# Altium PCB PCB.PcbDoc
Units mil, origin at the board's own origin, x right, y up, seen from the top; angles counter-clockwise.
Board outline 3641.73 x 2854.33 mil, 2 copper layers (Top Layer, Bottom Layer); 65 components, 62 nets, 324 pads, 123 vias.
Unrouted connection lines stored in the file: 2.
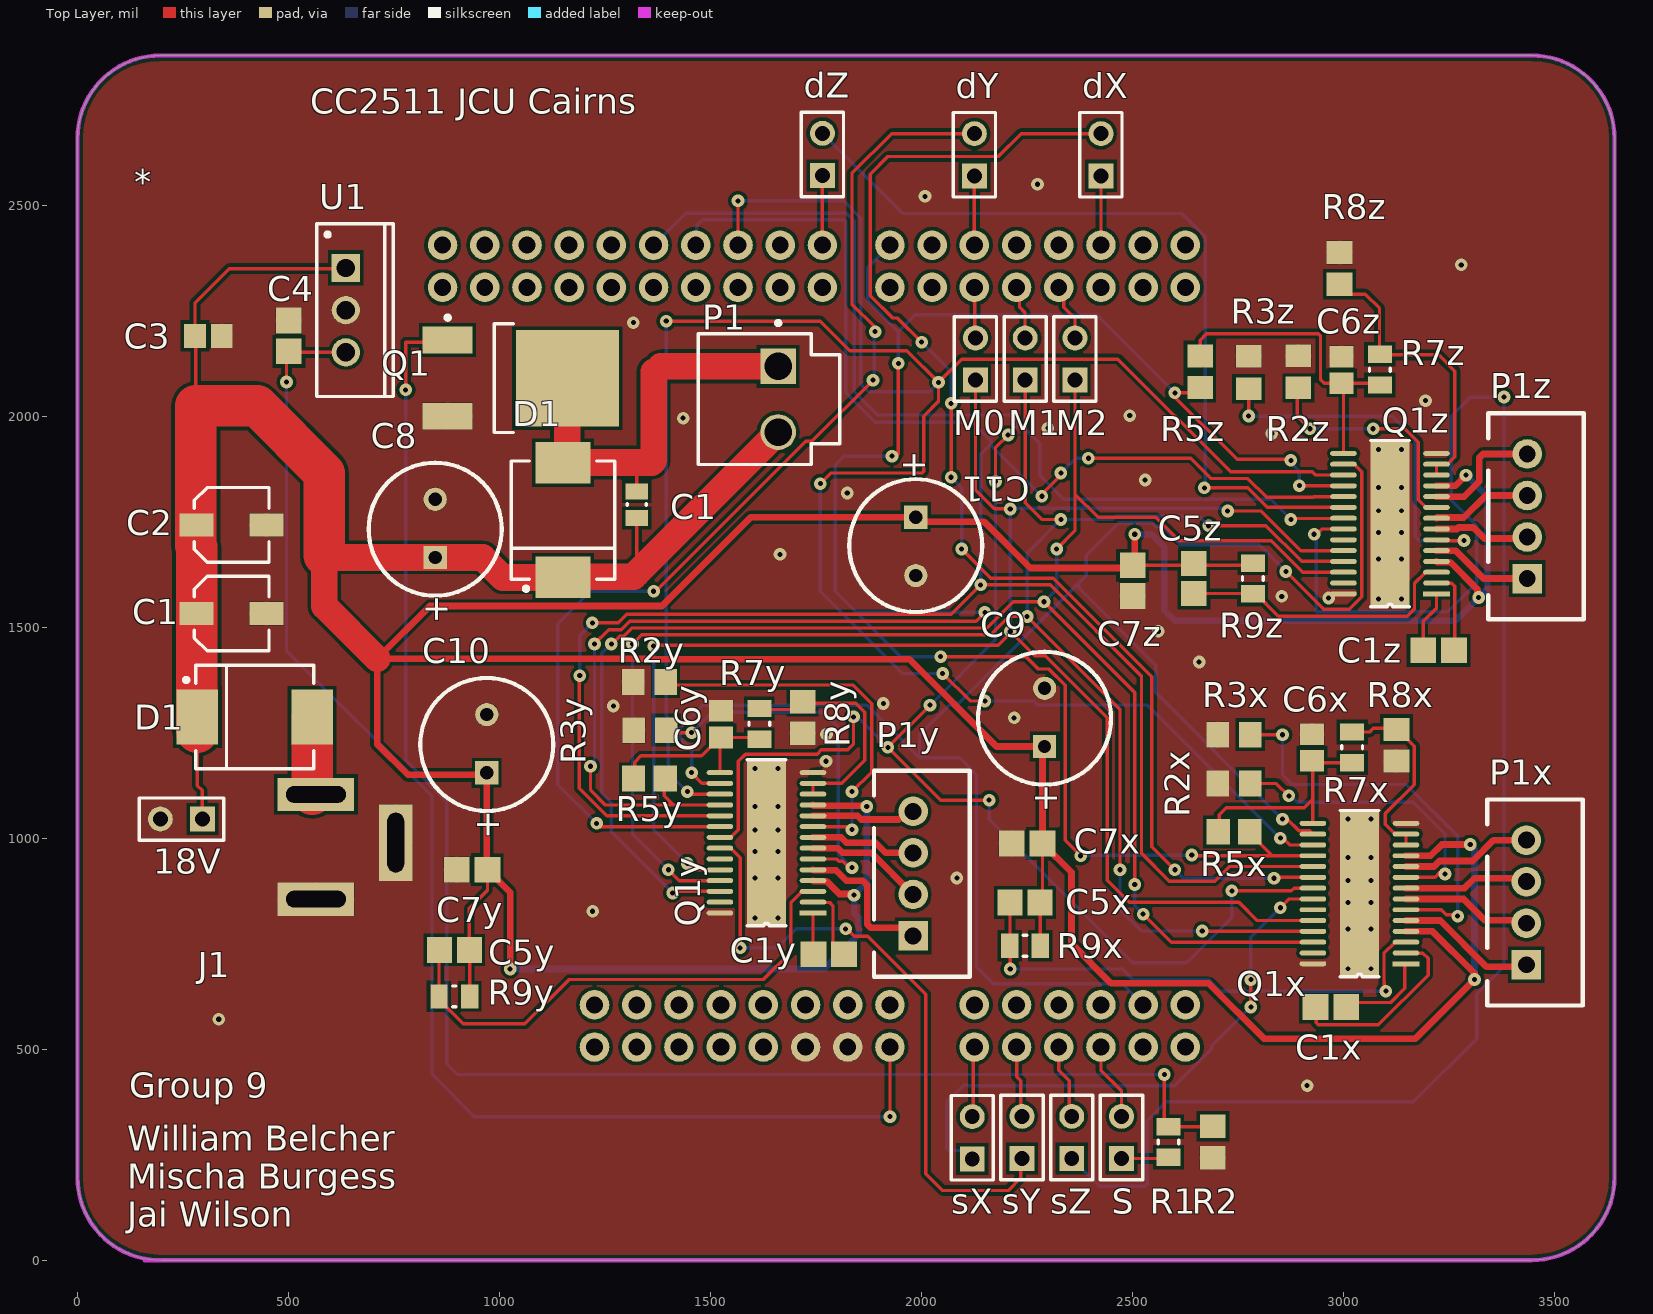
[diagram p0: Top Layer view]
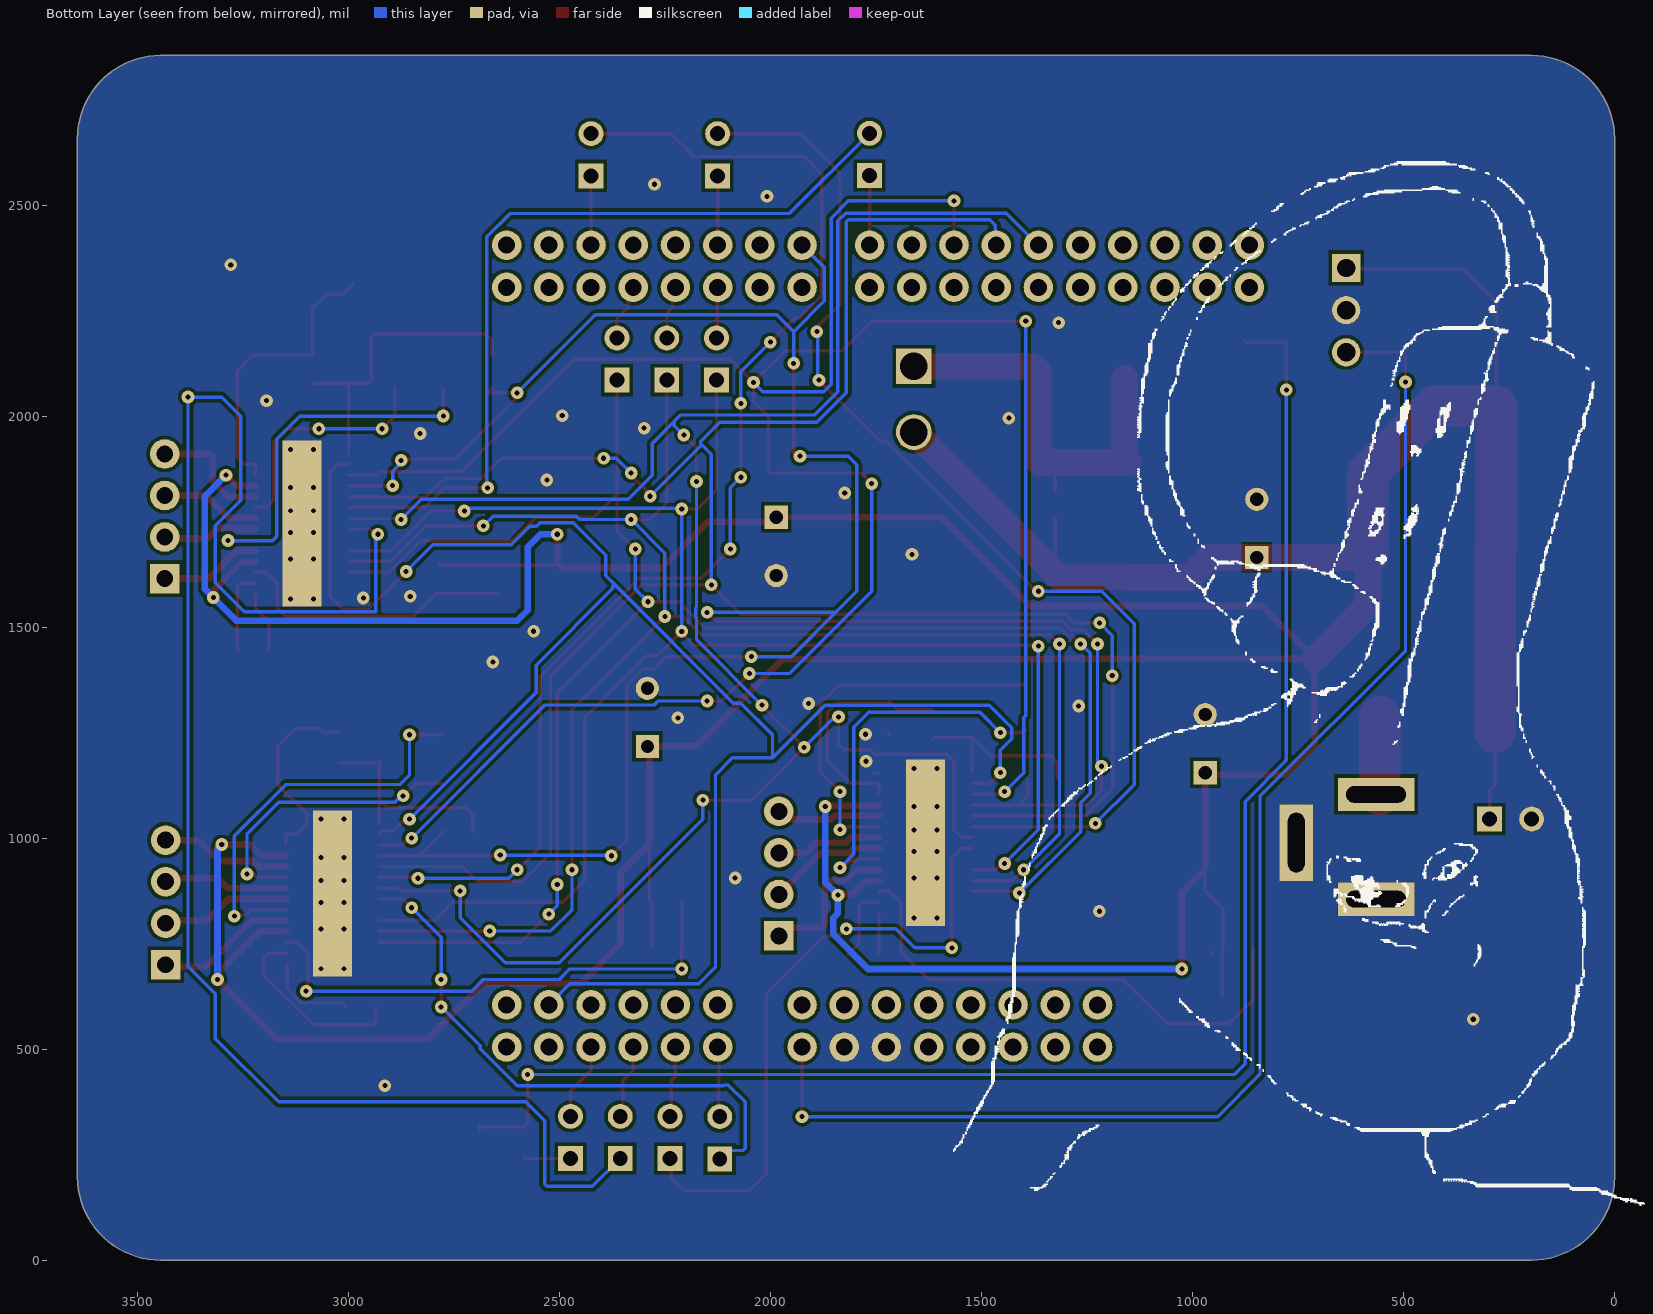
[diagram p1: Bottom Layer view, seen from below]

## Layer stack, top to bottom
Top Solder: solder mask 0.4, Solder Resist, Dk 3.5
Top Layer: signal copper 1.4
Dielectric 1: dielectric 12.6, FR-4, Dk 4.8
Bottom Layer: signal copper 1.4
Bottom Solder: solder mask 0.4, Solder Resist, Dk 3.5

## Board outline
3444.88,0 ccw(c3444.88,196.85) 3641.73,196.85 3641.73,2657.48 ccw(c3444.88,2657.48) 3444.88,2854.33 196.85,2854.33 ccw(c196.85,2657.48) 0,2657.48 0,196.85 ccw(c196.85,196.85) 196.85,0

## Design rules (kind name [scope] priority, off if disabled: settings)
Clearance [All] p1: gap=8 ignorepadtopadclearanceinfootprint=TRUE
HoleSize [All] p1: absolutevalues=TRUE maxlimit=150 minlimit=11 maxpercent=80.000 minpercent=20.000
MinimumSolderMaskSliver [All] p1: minsoldermaskwidth=1.8
PolygonConnect "DRV8825 Heatsinking" [HasFootprint('DRV8825 HTSSOP') vs InNet('GND')] p1: connectstyle=Direct reliefconductorwidth=10 reliefentries=4 polygonreliefangle="90 Angle" airgapwidth=10
RoutingVias [All] p1: holewidth=12 width=30 viastyle="Through Hole" minholewidth=12 minwidth=30 maxholewidth=28 maxwidth=50
SilkToSilkClearance [All] p1 off: silktosilkclearance=0.8
SilkToSolderMaskClearance [IsPad] p1 off: minsilkscreentomaskgap=10 clearancetoexposedcopper=TRUE
SolderMaskExpansion [All] p1: expansion=4
Width [All] p1: maxlimit=236.22 minlimit=8 preferedwidth=8
26 further rules are at their usual default settings.

## Classes and differential pairs
channel class StepperController: SC1 SC2 SC3
component class Schematic: C8 C9 C10 C11 dX dY M0 M1 M2 S sX sY sZ
component class SC3: C1z C5z C6z C7z P1z Q1z R2z R3z R5z R7z R8z R9z
component class SC2: C1y C5y C6y C7y P1y Q1y R2y R3y R5y R7y R8y R9y
component class SC1: C1x C5x C6x C7x P1x Q1x R2x R3x R5x R7x R8x R9x
component class PR: 18V C1 C2 C3 C4 D1 J1 U1
component class MC: 18V C1 D1 P1 Q1 R1 R2
component class H1: *

## Components (designator, comment, footprint, x,y, rotation, side; value= is the part's Value field where it differs from the comment)
18V "Header 2" HDR1X2 296.26,1045.28 r180 top (schematic designator P1)
* "NXP FRDM-K22F" FRDM-K22F 125,405 r0 top locked
C1 "CAP 1uF 25V 0805(2012)" CAPC0805(2012)145_L 1325,1790 r90 top value=1uF
C1 "EEE-1CA100SR" PNSC-EEE1CA100SR_L 365,1532.17 r0 top
C1x "08055C103JAT2A" CAPC2013X94X50ML20T25 2970,600 r180 top (schematic designator C1)
C1y "08055C103JAT2A" CAPC2013X94X50ML20T25 1780,725 r0 top (schematic designator C1)
C1z "08055C103JAT2A" CAPC2013X94X50ML20T25 3225,1445 r0 top (schematic designator C1)
C2 "EEE-1CA100SR" PNSC-EEE1CA100SR_L 365,1742.17 r0 top
C3 "08053C334KAT2A" CAPC2013X140X50NL20T25 310,2190 r0 top
C4 "08055C103JAT2A" CAPC2013X94X50ML20T25 500.82,2189.96 r270 top
C5x "C0805C104K3RAC7800" CAPC2013X145X50ML20T25 2245,847.53 r0 top (schematic designator C5)
C5y "C0805C104K3RAC7800" CAPC2013X145X50ML20T25 892.99,735 r0 top (schematic designator C5)
C5z "C0805C104K3RAC7800" CAPC2013X145X50ML20T25 2645,1615 r90 top (schematic designator C5)
C6x "C0805C474K5RACTU" CAPC2013X110X50NL20T25 2925,1215 r270 top (schematic designator C6)
C6y "C0805C474K5RACTU" CAPC2013X110X50NL20T25 1525,1270 r270 top (schematic designator C6)
C6z "C0805C474K5RACTU" CAPC2013X110X50NL20T25 2995,2109.43 r270 top (schematic designator C6)
C7x "08055C103JAT2A" CAPC2013X94X50ML20T25 2250,987.55 r0 top (schematic designator C7)
C7y "08055C103JAT2A" CAPC2013X94X50ML20T25 935,925.34 r0 top (schematic designator C7)
C7z "08055C103JAT2A" CAPC2013X94X50ML20T25 2500,1610 r90 top (schematic designator C7)
C8 "100uF, 50V" "Capacitor radial 8mm" 847.42,1665 r90 top
C9 "100uF, 50V" "Capacitor radial 8mm" 2291.43,1217.2 r90 top
C10 "100uF, 50V" "Capacitor radial 8mm" 969.91,1155 r90 top
C11 "100uF, 50V" "Capacitor radial 8mm" 1986.23,1760 r270 top
D1 "B540C-13-F" FP-SMC-MFG 1150.31,1753.42 r90 top value=300pF
D1 "B540C-13-F" FP-SMC-MFG 420,1287.17 r0 top value=300pF
dX "Header 2" HDR1X2 2425,2569.2 r90 top (schematic designator P3)
dY "Header 2" HDR1X2 2125,2569.2 r90 top (schematic designator P6)
dZ "Header 2" HDR1X2 1765,2570 r90 top (schematic designator P10)
J1 "Barrel Jack 5.5x2.1mm" "Barrel Jack 2.1x5.5mm THT" 565,564.1 r0 top
M0 "Header 2" HDR1X2 2127.61,2085 r90 top (schematic designator P5)
M1 "Header 2" HDR1X2 2245.49,2085 r90 top (schematic designator P7)
M2 "Header 2" HDR1X2 2363.38,2085 r90 top (schematic designator P8)
P1 "B2P-VH(LF)(SN)" JST-B2P-VH(LF)(SN)_V 1605,2040 r270 top
P1x "B4B-XH-A (LF)(SN)" "B4B-XH-A (LF)(SN)" 3432.78,700 r90 top (schematic designator P1)
P1y "B4B-XH-A (LF)(SN)" "B4B-XH-A (LF)(SN)" 1980,768.15 r90 top (schematic designator P1)
P1z "B4B-XH-A (LF)(SN)" "B4B-XH-A (LF)(SN)" 3435,1615 r90 top (schematic designator P1)
Q1 "NTD6415ANLT4G" ONSC-DPAK-3-369AA-01_V 1050.31,2090 r0 top
Q1x "DRV8825" "DRV8825 HTSSOP" 3147.68,702.32 r180 top (schematic designator Q1)
Q1y "DRV8825" "DRV8825 HTSSOP" 1742.68,822.61 r180 top (schematic designator Q1)
Q1z "DRV8825" "DRV8825 HTSSOP" 3220,1578.82 r180 top (schematic designator Q1)
R1 "RK73H2ATTD1R00F" RESC2013X60X30NL20T20 2585,280 r90 top
R2 "ERA6AEB103V" RESC2013X60X40ML20T25 2690,280 r90 top
R2x "RL1220S-R20-F" RESC2013X50X40ML20T20 2740,1129.34 r0 top (schematic designator R2)
R2y "RL1220S-R20-F" RESC2013X50X40ML20T20 1355,1370 r0 top (schematic designator R2)
R2z "RL1220S-R20-F" RESC2013X50X40ML20T20 2892.47,2105 r270 top (schematic designator R2)
R3x "RL1220S-R20-F" RESC2013X50X40ML20T20 2740,1245 r0 top (schematic designator R3)
R3y "RL1220S-R20-F" RESC2013X50X40ML20T20 1356.61,1255.66 r0 top (schematic designator R3)
R3z "RL1220S-R20-F" RESC2013X50X40ML20T20 2775,2103.39 r270 top (schematic designator R3)
R5x "ERA6AEB103V" RESC2013X60X40ML20T25 2740,1015 r0 top (schematic designator R5)
R5y "ERA6AEB103V" RESC2013X60X40ML20T25 1355,1141.32 r0 top (schematic designator R5)
R5z "ERA6AEB103V" RESC2013X60X40ML20T25 2660,2105 r270 top (schematic designator R5)
R7x "CRCW08051K60FKEA" RESC2013X50X30NL20T20 3020,1215 r270 top (schematic designator R7)
R7y "CRCW08051K60FKEA" RESC2013X50X30NL20T20 1615.72,1270.67 r270 top (schematic designator R7)
R7z "CRCW08051K60FKEA" RESC2013X50X30NL20T20 3085.72,2110 r270 top (schematic designator R7)
R8x "ERA6AEB103V" RESC2013X60X40ML20T25 3125,1220 r90 top (schematic designator R8)
R8y "ERA6AEB103V" RESC2013X60X40ML20T25 1718.25,1285.94 r90 top (schematic designator R8)
R8z "ERA6AEB103V" RESC2013X60X40ML20T25 2990,2350 r270 top (schematic designator R8)
R9x "RK73B2ATTD105J" RESC2013X60X30NL20T20 2245,745 r180 top (schematic designator R9)
R9y "RK73B2ATTD105J" RESC2013X60X30NL20T20 892.99,625 r180 top (schematic designator R9)
R9z "RK73B2ATTD105J" RESC2013X60X30NL20T20 2785,1615 r270 top (schematic designator R9)
S "Header 2" HDR1X2 2473.65,240.8 r90 top (schematic designator P10)
sX "Header 2" HDR1X2 2120,240 r90 top (schematic designator P2)
sY "Header 2" HDR1X2 2237.88,240.8 r90 top (schematic designator P4)
sZ "Header 2" HDR1X2 2355.77,240.8 r90 top (schematic designator P9)
U1 "L7805CV" TO220 635.83,2250.98 r270 top

## Footprints (in the part's own frame and the unit in brackets; to place one, negate y for a bottom-side part, rotate by r counter-clockwise, add the part's x,y. Pads: shape width x height; smd on the part's side, far side on the other; paste and mask are expansions set on the pad)
"B4B-XH-A (LF)(SN)" [mil] "B4B-XH-A (LF)(SN) Wire-To-Board Connector, Vertical, 2.5 mm, 4 Contacts"
  rect 70x70 hole 40: 1(0,0)
  round 70 hole 40: 2(98.43,0) 3(196.85,0) 4(295.28,0)
  silkscreen extent -96,-134 392,93, body extent -97,-134 391,92, height 276
"Barrel Jack 2.1x5.5mm THT" [mm] "GCT DCJ200-10-A-K1-K"
  rect 4.6x2 hole 1 slot 3.6 at 0 deg: 1(0,13.7) 2(0,7.4)
  rect 2x4.6 hole 1 slot 3.6 at 90 deg: 2(4.8,10.8)
  body extent -4.47,0 5.07,14.3, height 11
"Capacitor radial 8mm" [mm] "Radial electrolytic cap, 8mm body, 3.5mm pin separation"
  rect 1.4x1.4 hole 0.8: 1(0,0)
  round 1.4 hole 0.8: 2(3.5,0)
  silkscreen extent -2.3,-4 5.7,4, body extent -2.2,-4 5.8,4, height 11.5
CAPC0805(2012)145_L [mm] "Chip Capacitor, Body 2.0x1.2mm, Height 1.45mm, IPC High Density"
  rect 0.95x1.35 smd: 1(-0.8,0) 2(0.8,0)
  silkscreen extent -0.05,-0.58 0.05,0.58, body extent -1.1,-0.72 1.1,0.72, height 1.45
CAPC2013X94X50ML20T25 [mm] "Chip Capacitor, 2-Leads, Body 2.01x1.25mm, IPC Low Density"
  rect 1.55x1.55 smd: 1(-0.925,0) 2(0.925,0)
  body extent -1.1,-0.72 1.11,0.72, height 0.94
CAPC2013X110X50NL20T25 [mm] "Chip Capacitor, 2-Leads, Body 2.00x1.25mm, IPC Medium Density"
  rect 1.3x1.45 smd: 1(-0.8,0) 2(0.8,0)
  body extent -1.1,-0.72 1.1,0.72, height 1.1
CAPC2013X140X50NL20T25 [mm] "Chip Capacitor, 2-Leads, Body 2.00x1.25mm, IPC Medium Density"
  rect 1.3x1.45 smd: 1(-0.8,0) 2(0.8,0)
  body extent -1.1,-0.72 1.1,0.72, height 1.4
CAPC2013X145X50ML20T25 [mm] "Chip Capacitor, 2-Leads, Body 2.00x1.25mm, IPC Low Density"
  rect 1.5x1.55 smd: 1(-0.9,0) 2(0.9,0)
  body extent -1.1,-0.72 1.1,0.72, height 1.45
"DRV8825 HTSSOP" [mm]
  rect 1.6x0.3 smd paste+0 mask+0.07: 1(0,0)
  oval 1.6x0.3 smd paste+0 mask+0.07: 2(0,-0.65) 3(0,-1.3) 4(0,-1.95) 5(0,-2.6) 6(0,-3.25) 7(0,-3.9) 8(0,-4.55) 9(0,-5.2) 10(0,-5.85) 11(0,-6.5) 12(0,-7.15) 13(0,-7.8) 14(0,-8.45) 15(5.6,-8.45) 16(5.6,-7.8) 17(5.6,-7.15) 18(5.6,-6.5) 19(5.6,-5.85) 20(5.6,-5.2) 21(5.6,-4.55) 22(5.6,-3.9) 23(5.6,-3.25) 24(5.6,-2.6) 25(5.6,-1.95) 26(5.6,-1.3) 27(5.6,-0.65) 28(5.6,0)
  round 0.6 hole 0.3: PPAD(2.1,0.3) PPAD(2.1,-3.7) PPAD(2.1,-2.1) PPAD(2.1,-6.4) PPAD(2.1,-5) PPAD(2.1,-8.7) PPAD(3.5,-2.1) PPAD(3.5,0.3) PPAD(3.5,-8.7) PPAD(3.5,-6.4) PPAD(3.5,-5) PPAD(3.5,-3.7)
  rect 2.34x5.18 smd paste+0: PPAD(2.8,-4.225)
  rect 2.34x10 smd paste-100 mask-100: PPAD(2.8,-4.225)
  rect 2.34x10 smd far side paste-100 mask-100: PPAD(2.8,-4.225)
  Top Layer region: 1.1,0.9
  silkscreen extent 1.63,-9.23 3.98,0.77, body extent -0.65,-9.34 6.25,0.87, height 1.11
FP-SMC-MFG [mm]
  rect 2.5x3.3 smd paste+0 mask+0: 1(-3.45,0) 2(3.45,0)
  silkscreen extent -4.25,-3.11 3.55,3.11, body extent -4.8,-3.21 4.8,3.21, height 0.25
FRDM-K22F [mil] "NXP FRDM-K22F development board"
  round 70 hole 40: J1_1(2500,1900) J1_2(2500,2000) J1_3(2400,1900) J1_4(2400,2000) J1_5(2300,1900) J1_6(2300,2000) J1_7(2200,1900) J1_8(2200,2000) J1_9(2100,1900) J1_10(2100,2000) J1_11(2000,1900) J1_12(2000,2000) J1_13(1900,1900) J1_14(1900,2000) J1_15(1800,1900) J1_16(1800,2000) J2_1(1640,1900) J2_2(1640,2000) J2_3(1540,1900) J2_4(1540,2000) J2_5(1440,1900) J2_6(1440,2000) J2_7(1340,1900) J2_8(1340,2000) J2_9(1240,1900) J2_10(1240,2000) J2_11(1140,1900) J2_12(1140,2000) J2_13(1040,1900) J2_14(1040,2000) J2_15(940,1900) J2_16(940,2000) J2_17(840,1900) J2_18(840,2000) J2_19(740,1900) J2_20(740,2000) J24_1(2000,200) J24_2(2000,100) J24_3(2100,200) J24_4(2100,100) J24_5(2200,200) J24_6(2200,100) J24_7(2300,200) J24_8(2300,100) J24_9(2400,200) J24_10(2400,100) J24_11(2500,200) J24_12(2500,100) J25_1(1100,200) J25_2(1100,100) J25_3(1200,200) J25_4(1200,100) J25_5(1300,200) J25_6(1300,100) J25_7(1400,200) J25_8(1400,100) J25_9(1500,200) J25_10(1500,100) J25_11(1600,200) J25_12(1600,100) J25_13(1700,200) J25_14(1700,100) J25_15(1800,200) J25_16(1800,100)
  body extent 690,50 2550,2050, height 335
HDR1X2 [mm] "Connector; Header; 2 Position"
  rect 1.5x1.5 hole 0.9: 1(0,0)
  round 1.5 hole 0.9: 2(2.54,0)
  silkscreen extent -1.27,-1.27 3.81,1.27
JST-B2P-VH(LF)(SN)_V [mm] "THD, 2-Leads, Body 8.5x7.86mm, Pitch 3.96mm"
  rect 2.15x2.15 hole 1.65: 1(-1.98,1.4)
  round 2.15 hole 1.65: 2(1.98,1.4)
  silkscreen extent -4.7,-3.4 3.93,5.1, body extent -3.93,-3.2 3.93,5.3, height 10.9
ONSC-DPAK-3-369AA-01_V [mm] "DPAK, 3-Leads, Body 6.54x6.095mm, Pitch 2.29mm"
  rect 3x1.6 smd: 1(-4.4,2.29) 3(-4.4,-2.29)
  rect 6.2x5.8 smd: 4(2.8,0)
  silkscreen extent -4.52,-3.27 -0.45,3.76, body extent -1.6,-3.27 4.49,3.27, height 2.47
PNSC-EEE1CA100SR_L [mm] "Aluminum Electrolytic Capacitor, 2-Leads, Body 4.5x4.5mm, IPC High Density"
  rect 2.05x1.4 smd: 1(-2.1,0) 2(2.1,0)
  silkscreen extent -2.25,-2.25 2.25,2.25, body extent -2.75,-2.25 2.75,2.25, height 5.5
RESC2013X50X30NL20T20 [mm] "Chip Resistor, 2-Leads, Body 2.00x1.25mm, IPC Medium Density"
  rect 1.05x1.45 smd: 1(-0.925,0) 2(0.925,0)
  silkscreen extent -0.1,-0.63 0.1,0.63, body extent -1.1,-0.72 1.1,0.72, height 0.5
RESC2013X50X40ML20T20 [mm] "Chip Resistor, 2-Leads, Body 2.00x1.25mm, IPC Low Density"
  rect 1.35x1.55 smd: 1(-0.975,0) 2(0.975,0)
  body extent -1.1,-0.72 1.1,0.72, height 0.5
RESC2013X60X30NL20T20 [mm] "Chip Resistor, 2-Leads, Body 2.00x1.25mm, IPC Medium Density"
  rect 1.05x1.45 smd: 1(-0.925,0) 2(0.925,0)
  silkscreen extent -0.1,-0.63 0.1,0.63, body extent -1.1,-0.72 1.1,0.72, height 0.6
RESC2013X60X40ML20T25 [mm] "Chip Resistor, 2-Leads, Body 2.00x1.25mm, IPC Low Density"
  rect 1.4x1.55 smd: 1(-0.95,0) 2(0.95,0)
  body extent -1.1,-0.72 1.1,0.72, height 0.6
TO220 [mm] "TO, Thru-Hole, Vertical, Heatsink Mounted; 3 In-Line Leads; Pitch 2.54 mm"
  rect 1.7x1.7 hole 1.1: 1(-2.54,0)
  round 1.7 hole 1.1: 2(0,0) 3(2.54,0)
  silkscreen extent -5.2,-1.75 5.2,2.85, body extent -5.25,-1.8 5.25,2.9, height 19.7

## Part data
18V dX dY dZ M0 M1 M2 S sX sY sZ: "Header, 2-Pin", LatestRevisionDate=17-Jul-2002, LatestRevisionNote="Re-released for DXP Platform.", Publisher="Altium Limited"
C1: library part CMP-1036-04757-1, "CAP 1uF 25V -20% to +80% 0805 (2012 Metric) Thickness 1.45mm SMD", Case-EIA=0805, Case-Metric=2012, Rated Voltage="25 V", Tolerance="-20% to +80%", Max Thickness="1.45 mm", Technology=SMT
C1 C2: library part CMP-2000-06199-1, "Aluminum Electrolytic Capacitor, 10 uF, +/- 20%, -40 to 85 degC, 2-Pin SMD, RoHS, Tape and Reel", AC Ripple Current=28mA, AE Capacitor Case=RadialCan-SMD, Capacitance=10µF, Capacitance Tolerance=±20%, Capacitor Mounting=SMD, Leakage Current=3µA, Life Time @ Temperature=2000hours@85°C, Manufacturer=Panasonic, Operating Life Temperature=85°C, Operating life Time=2000h, Operating Temperature Min=-40°C, Operating Temperature Range=-40°Cto+85°C, Package / Case=B, Package Description="2-Pin Surface Mount Device, Body 4.5 x 4.5 mm", Package Reference=EEE1CA100SR, Power Factor=0.16, Power Factor Frequency=120Hz, Tolerance +=20%, Voltage Rating=16V, Capacitance Tolerance ±=±20%, Capacitor Case Style=RadialCan-SMD, Capacitor Terminals=SMD, Datasheet URL=https://datasheet.ciiva.com/19458/1355487-19458346.pdf, Datasheet Version=04/2005, Diameter=4mm, External Depth=4.3mm, External Length / Height=5.4mm, External Width=4.3mm, Height=5.4mm, Lead Cross-section Width=0.65mm, Lead Length=1.8mm, Lead Spacing=1mm, Lifetime @ Temperature=2000hours@85°C, Manufacturer URL=http://www.panasonic.com/, Mounting Technology=SurfaceMount, No. of Pins=2, Operating Lifetime=2000h, Operating Temperature Max=85°C, Packaging=CutTape, Product Range=PANASONIC-SSeries, Ripple Current AC=28mA, Ripple Current Frequency=120Hz, Ripple Current Temperature=85°C, Series=VS, SVHC=NoSVHC(16-Dec-2013), Tape Width=12mm, Tolerance -=20%, Voltage Rating V DC=16V
C1x C1y C1z C4 C7x C7y C7z: library part CMP-2007-04361-1, Manufacturer="AVX Interconnect / Elco", Part Number=08055C103JAT2A
C3: library part CMP-2007-04608-1, Manufacturer="AVX Interconnect / Elco", Part Number=08053C334KAT2A
C5x C5y C5z: library part CMP-2007-01100-1, Manufacturer=Kemet, Part Number=C0805C104K3RAC7800
C6x C6y C6z: library part CMP-2007-03659-1, Manufacturer=Kemet, Part Number=C0805C474K5RACTU
C8 C9 C10 C11: library part "Cap 100uF, 50V, THT radial", "Electrolytic Capacitor, 100 µF, 50 V, ± 20%, Radial Leaded, 8 mm"
D1 D1: library part CMP-12790-000056-1, "DIODE SCHOTTKY 40V 5A SMC", Capacitance=300pF, Forward Current=5A, Manufacturer="Diodes Inc.", Max Junction Temp=+150°C, Max Repetitive Reverse Voltage=40V, Max Surge Forward Current=100A, Package=SMC, Peak Reverse Current=0.5mA, Temperature="-55°C to +150°C", Temperature Range Low=-55°C, Automotive=No, Automotive Grade=NA, Category=Diode, ComponentLink2Description=Datasheet, ComponentLink2URL=https://www.diodes.com/assets/Datasheets/ds13012.pdf, Device Class L1="Discrete Semiconductors", Device Class L2=Diodes, Device Class L3="Schottky Diodes", Digikey Description="DIODE SCHOTTKY 40V 5A SMC", Footprint Url=https://www.diodes.com/assets/Package-Files/SMC.pdf, Height=2.5mm, Lead Free=Yes, Manufacturer Part Number=B540C-13-F, Mouser Description="Diode: Schottky rectifying; SMD; 40V; 5A; SMC; Package: reel, tape", Octopart=https://octopart.com/b540c-13-f-diodes+inc.-325873, Reverse Voltage=40V, RoHS=TRUE, Standoff Height=0.1mm, Temperature Range High=+150°C
J1: "GCT DCJ200-10-A-K1-K"
P1: library part CMP-1755-00002-1, "Male Header, Pitch 3.96 mm, 1 x 2 Position, Height 10.9 mm, Tail Length 3.7 mm, -25 to 85 degC, RoHS, Bulk", Capacitance="27 pF", Case/Package=0603, Case Code (Metric)=1608, Max Operating Temperature=125degC, Min Operating Temperature=-55degC, Package Quantity=4000, Resistance="100000000000 Ohm", Tolerance=5%, Type (Capacitors)=C0G, Voltage Rating="50 V", Case Code (Imperial)=0603, ComponentLink1Description="Manufacturer URL", ComponentLink1URL=http://www.jst.com/home2.html, ComponentLink2Description=Datasheet, ComponentLink2URL=http://www.jst-mfg.com/product/pdf/eng/eVH.pdf, DatasheetVersion=May-16, Height="0.8 mm", Length="1.6 mm", Mount="Surface Mount", PackageDescription="Male Header, Pitch 3.96 mm, 1 x 2 Position, Height 10.9 mm, Tail Length 3.7 mm", PackageReference=B2P-VH(LF)(SN), Packaging="Tape and Reel", Pins=2, Radiation Hardening=No, REACH SVHC="No SVHC", RoHSCompliant=True, Voltage Rating (DC)="50 V", Width="0.8 mm"
P1x P1y P1z: library part "B4B-XH-A (LF)(SN) Wire-to-board connector", "Wire-to-board connector, vertical, 2.5mm, 4 contacts"
Q1: library part CMP-1058-00352-1, "N-Channel Power MOSFET, 100 V, 23 A, 56 mOhm, 3-Pin DPAK, Pb-Free, Tape and Reel", Manufacturer="On Semiconductor", Package Type=DPAK-3, Channel Polarity="N Channel", Ciss Typ (pF)=1024, ComponentLink1Description="Manufacturer URL", ComponentLink1URL=http://www.onsemi.com/, ComponentLink2Description=Datasheet, ComponentLink2URL=http://www.onsemi.cn/pub_link/Collateral/NTD6415ANL-D.PDF, ComponentLink3Description="Package Specification", ComponentLink3URL=http://www.onsemi.cn/pub_link/Collateral/369AA.PDF, Configuration=Single, Coss Typ (pF)=156, Crss Typ (pF)=70, DatasheetVersion="Rev. 1", ID Max (A)=23, Mounting Technology="Surface Mount", PackageDescription="3-Pin Flange Mount, Body 6.54 x 6.095 mm, Pitch 2.29 mm", PackageReference=DPAK-3-369AA-01, PackageVersion="Rev. B, 06/2010", Packing="Tape and Reel", PartNumber=NTD6415ANLT4G, PD Max (W)=83, Qrr Typ (nC)=152, RoHS=Pb-Free, VGS(th) Max (V)=2, VGS Max (V)=20
Q1x Q1y Q1z: library part "Stepper motor driver DRV8825", "TI DRV8825 Stepper Motor Controller IC"
R1: library part CMP-2001-02169-1, Manufacturer="KOA Speer", Part Number=RK73H2ATTD1R00F
R2 R5x R5y R5z R8x R8y R8z: library part CMP-2001-00582-1, Manufacturer=Panasonic, Part Number=ERA6AEB103V
R2x R2y R2z R3x R3y R3z: library part CMP-2001-03157-1, Manufacturer=Susumu, Part Number=RL1220S-R20-F
R7x R7y R7z: library part CMP-2001-03618-1, Manufacturer="Vishay Dale", Part Number=CRCW08051K60FKEA
R9x R9y R9z: library part CMP-2001-04658-1, Manufacturer="KOA Speer", Part Number=RK73B2ATTD105J
U1: library part CMP-0244-00483-1, "Positive Voltage Regulator, 5V, 3-Pin TO-220", ComponentLink1Description="Manufacturer URL", ComponentLink1URL=http://www.st.com, ComponentLink2Description=Datasheet, ComponentLink2URL=http://www.st.com/internet/com/TECHNICAL_RESOURCES/TECHNICAL_LITERATURE/DATASHEET/CD00000444.pdf, ComponentLink3Description="Package Specification", ComponentLink3URL=http://www.st.com/internet/com/TECHNICAL_RESOURCES/TECHNICAL_LITERATURE/PACKAGE_INFORMATION/CD00004649.pdf, DatasheetVersion=16/11/2011, PackageDescription="TO, Thru-Hole, Vertical, Heatsink Mounted; 3 In-Line Leads; Pitch 2.54 mm", PackageReference=TO220, PackageVersion=ver3.0

## Via types
v1: diameter 30, hole 12, Top Layer to Bottom Layer, 123 vias

## Nets (pads, with @x,y where several pads share a name; then routed paths per layer and width w, separated by ;. In a path a pad name is that pad's centre, name@x,y a point inside that pad or via, vN(x,y) a via of type N, cw(c..) or ccw(c..) an arc to the next point about the centre after c; other vN are vias at no path point)
3V3: C6x.2 C6y.2 C6z.2 Q1x.15 Q1y.15 Q1z.15 R5x.1 R5y.1 R5z.1 R7x.2 R7y.2 R7z.2 | length 1717.2
  Top Layer w8: R5y.1 1320,1143.72 1320,1180 1335,1195 1478.54,1195 1522.05,1238.5 C6y.2 ; Q1y.15 1522.2,1235.71 C6y.2 ; R7y.2@1615.72,1231.81 1609.02,1238.5 C6y.2 ; R5z.1 2660,2180 2675,2195 2940.31,2195 2945,2190.31 2945,2087.39 2954.46,2077.94 C6z.2 ; R5x.1 2705,1017.4 2705,1055 2722,1072 2907,1072 2927.2,1092.2 ; C6x.2 C6x.2@2927.2,1181.3 ; Q1x.15 2927.2,1092.2 ; Q1z.15 2999.53,2073.41 C6z.2 ; R7x.2 2929.92,1178.58 C6x.2@2927.2,1181.3 ; R7z.2 3081.36,2077.94 C6z.2 ; 2927.2,1092.2 C6x.2@2927.2,1181.3
5V: *.J25_16 C4.2 U1.3 | length 3286.3
  Top Layer w8: v1(495.08,2080.71) 495.08,2147.81 C4.2 503.38,2150.98 U1.3 ; v1(1925,340) *.J25_16
  Bottom Layer w8: v1(495.08,2080.71) 495.08,1443.91 840,1098.99 840,440 940,340 v1(1925,340)
18V: 18V.1 C1.1 C2.1 C3.1 C5x.2 C5y.2 C5z.2 C7x.2 C7y.2 C7z.2 C8.1 C9.1 C10.1 C11.1 D1.1 P1.2 Q1x.4 Q1x.11 Q1y.4 Q1y.11 Q1z.4 Q1z.11 R9x.1 R9y.1 R9z.1 U1.1 | length 14727.9
  Top Layer w8: 280,1692.32 282.32,1690 ; 280,2024.25 280,2188.5 C3.1 278.5,2268.5 359.41,2349.41 634.25,2349.41 U1.1 ; D1.1@284.17,1250.75 284.17,1124.29 295.28,1113.19 295.28,1046.26 18V.1 ; R9y.1 929.4,734.02 C5y.2 928.42,833.42 971.42,876.42 C7y.2 ; C5y.2@950,730 C5y.2@952.83,727.17 ; 1317.82,1619.75 1325,1626.93 C1.1@1325,1758.5 ; R9x.1 2281.42,846.55 C5x.2 2286.42,853.51 C7x.2 ; C7z.2@2505,1651.42 C7z.2 2780,1646.42 R9z.1 ; Q1z.4 Q1z.4 Q1z.4@3245.59,1655.59
  Top Layer w15.75: v1(1025,690) 1025,871.76 C7y.2 969.91,926.85 C10.1 964.91,1150 782.8,1150 710,1222.8 710,1425 ; Q1y.4 1744.65,897.41 1775.45,897.41 1805.13,867.73 1837.27,867.73 v1(1840,865) ; Q1y.11 1744.43,1076.76 1868.24,1076.76 v1(1870,1075) ; C7z.2 2493.58,1640 2257.5,1640 2147.5,1750 1996.23,1750 C11.1 1595,1760 1384.87,1549.87 834.87,1549.87 710,1425 ; C7z.2@2505,1651.42 v1(2505,1720) ; Q1x.4 3210.91,779.09 3310,680 v1(3310,665) 3170,525 2811.34,525 2680.46,655.87 2449.13,655.87 2355,750 2355,918.97 C7x.2 2286.42,1212.2 C9.1 2177.8,1217.2 1970.87,1424.13 1352.21,1424.13 1351.34,1425 710,1425 ; Q1x.11 3205.98,958.23 3232.75,985 v1(3300,985) ; Q1z.11 3264.72,1834.72 v1(3290,1860) ; Q1z.4 3221.97,1653.62 3252.77,1653.62 3317.27,1589.12 3317.27,1572.73 v1(3320,1570)
  Top Layer w62.99: 710,1425 585,1550 585,1670 590,1665 C8.1 960,1665 1007.41,1617.59 1150.31,1617.59 1152.47,1619.75 1317.82,1619.75 ; 1325,1626.93 P1.2
  Top Layer w98.43: 280,1692.32 280,2024.25 425.75,2024.25 585,1865 585,1670 ; 282.32,1690 282.32,1532.17 282.32,1252.6 D1.1@284.17,1250.75
  Bottom Layer w15.75: v1(1025,690) 1768.66,690 1850.87,772.21 1850.87,811.24 1840,822.11 v1(1840,865) 1870,895 v1(1870,1075) ; v1(2505,1720) 2545,1720 2575,1690 2575,1540 2600,1515 3265,1515 v1(3320,1570) 3340,1590 3340,1810 v1(3290,1860) ; v1(3300,985) 3310,975 v1(3310,665)
DECAY: *.J2_8 Q1x.19 Q1y.19 Q1z.19 | length 5588.3
  Top Layer w8: v1(1190,1385) 1188.55,1383.55 1188.55,1118.27 1253.89,1052.92 Q1y.19 ; v1(1220,1510) 1281.56,1510 1301.56,1530 2070,1530 v1(2140,1600) 2305,1600 2521,1384 2521,964 2587,898 2694.47,898 2729.11,932.64 Q1x.19 ; v1(2285,1810) 2285,1815 2330,1860 v1(2330,1865) ; v1(2395,1900) 2638.18,1900 2686.18,1852 2773.27,1852 2817.27,1808 2927.79,1808 2928.93,1809.13 Q1z.19
  Bottom Layer w8: v1(1190,1385) 1190,1480 v1(1220,1510) ; *.J2_8 1467,2407 1467,2452 1480,2465 1815,2465 1820,2460 1820,2055 1890,1985 2120,1985 2165,1940 2165,1935 ; v1(2140,1600) 2140,1910 2162.5,1932.5 2165,1935 ; v1(2285,1810) 2165,1930 2165,1935 ; v1(2330,1865) 2365,1900 v1(2395,1900)
DIRx: *.J1_6 dX.1 | length 164.2
  Top Layer w8: *.J1_6 dX.1
DIRy: *.J1_12 dY.1 | length 164.2
  Top Layer w8: *.J1_12 dY.1
DIRz: *.J2_2 dZ.1 | length 165
  Top Layer w8: *.J2_2 dZ.1
FAULT: *.J1_16 Q1x.18 Q1y.18 Q1z.18 R5x.2 R5y.2 R5z.2 | length 6041.8
  Top Layer w8: v1(1215.55,1170.28) 1215.55,1113.89 1250.93,1078.51 1411.49,1078.51 ; v1(1225,1460) 1259,1494 1288.19,1494 1308.19,1514 2129,1514 v1(2150,1535) ; R5y.2 1390,1138.92 1390,1100 1411.49,1078.51 ; Q1y.18 1411.49,1078.51 ; 1945,1910 v1(1945,2125) ; v1(2045,1430) 2247.37,1430 2276.68,1400.69 2301.68,1400.69 2340,1362.37 2340,995 v1(2376.77,958.23) ; v1(2640,960) 2641.77,958.23 2831.22,958.23 ; R5z.2 2672.6,2055 v1(2600,2055) 2600,2045 2747.5,1897.5 2872.5,1897.5 v1(2875,1895) ; R5x.2 2777.4,1012.05 2831.22,958.23 ; v1(2895,1835) 2895.14,1834.86 2999.39,1834.86 Q1z.18 ; Q1x.18 2881.77,958.23 2831.22,958.23
  Bottom Layer w8: v1(1215.55,1170.28) 1225,1179.72 v1(1225,1460) ; *.J1_16 1872,2352 1872,2273 1945,2200 ; v1(1930,1905) 1815,1905 1795,1885 1795,1585 1845,1535 ; v1(1945,2125) 1945,2200 ; v1(2045,1430) 1950,1430 1845,1535 ; v1(2150,1535) 1845,1535 ; v1(2376.77,958.23) 2377.66,959.11 2639.11,959.11 v1(2640,960) ; v1(2600,2055) 2415,2240 1985,2240 1945,2200 ; v1(2875,1895) 2875,1889.05 2895,1869.05 v1(2895,1835)
GND: 18V.2 *.J25_12 *.J25_14 C1.2@447.68,1532.17 C2.2 C3.2 C4.1 C6x.1 C6y.1 C6z.1 C7x.1 C7y.1 C7z.1 C8.2 C9.2 C10.2 C11.2 J1.2 Q1.3 Q1x.14 Q1x.28 Q1x.PPAD Q1y.14 Q1y.28 Q1y.PPAD Q1z.14 Q1z.28 Q1z.PPAD R2.1 R2x.1 R2y.1 R2z.1 R3x.1 R3y.1 R3z.1 R8x.1 R8y.1 R8z.1 U1.2 | length 17.5
  Top Layer w8: R8y.1 R8y.1@1720.72,1246.06 ; Q1y.14 1752.77,1155.29 Q1y.14@1754.53,1157.05
  Bottom Layer w8: v1(1773.62,1182.09) v1@1774.11,1182.58 ; v1@1774.11,1245.57 v1(1774.61,1246.06)
  other v1: 2913.39,413.39 334.65,570.87 1220.47,826.77 2083.66,905.51 2219.41,1284.91 1269.68,1312.99 1909.45,1318.9 2657.48,1417.32 2561.02,1490.16 2964.57,1568.9 2853.35,1572.83 1664.37,1672.24 1823.82,1817.91 2529.53,1848.43 2829.72,1958.66 2299.21,1971.46 1435.04,1995.08 2493.11,2000.98 3193.9,2036.42 1316.93,2221.46 3278.54,2358.27 2007.87,2520.67 2274.61,2549.21
MODE0: M0.1 Q1x.24 Q1y.24 Q1z.24 | length 4203.7
  Top Layer w8: v1(1365,1455) 1367,1457 2182,1457 2210,1485 v1(2210,1490) 2212.5,1487.5 2268.1,1431.9 2293.1,1431.9 2440,1285 2440,900 2492,848 2752,848 2795.31,804.69 Q1x.24 ; v1(1445,940) 1450.95,940 1465.98,924.97 Q1y.24 ; M0.1 2127.61,1825 2172.61,1780 v1(2210,1780) ; v1(2725,1775) 2805.02,1775 2898.84,1681.18 Q1z.24
  Bottom Layer w8: v1(1365,1455) 1365,1020 v1(1445,940) ; v1(2210,1490) v1(2210,1780) 2212,1782 2712.05,1782 2719.05,1775 v1(2725,1775)
MODE1: M1.1 Q1x.25 Q1y.25 Q1z.25 | length 4301.2
  Top Layer w8: v1(1315,1460) 1337,1482 2163.82,1482 2206.82,1525 v1(2250,1525) 2470,1305 v1(2470,925) ; v1(1400,925) 1425.62,899.38 Q1y.25 ; M1.1 2245.49,1794.51 2285,1755 v1(2330,1755) ; v1(2665,780) 2665.45,779.55 2926.75,779.55 Q1x.25 ; v1(2680,1740) 2815.89,1740 2900.3,1655.59 Q1z.25
  Bottom Layer w8: v1(1315,1460) 1315,1010 v1(1400,925) ; v1(2250,1525) 2250,1675 v1(2330,1755) 2452.37,1755 2460.37,1763 2657,1763 v1(2680,1740) ; v1(2470,925) 2470,830 2520,780 v1(2665,780)
MODE2: M2.1 Q1x.26 Q1y.26 Q1z.26 | length 4384.5
  Top Layer w8: v1(1265,1460) 1267.18,1460 1285.18,1478 1294.82,1478 1314.82,1498 2155,1498 2217,1560 v1(2290,1560) 2505,1345 v1(2505,890) ; v1(1410,870) 1413.79,873.79 Q1y.26 ; v1(2320,1685) 2363.38,1728.38 2363.38,1815 ; M2.1 2363.38,1815 ; v1(2525,820) 2592,753 2926.7,753 Q1x.26 ; Q1z.26 2903.26,1630 2828.26,1705 2610,1705 2555,1760 2418.38,1760 2363.38,1815
  Bottom Layer w8: v1(1265,1460) 1242.55,1437.55 1242.55,1105.87 1265,1083.43 1265,1015 v1(1410,870) ; v1(2290,1560) 2320,1590 v1(2320,1685) ; v1(2505,890) 2505,840 v1(2525,820)
nENABLE: *.J2_10 Q1x.21 Q1y.21 Q1z.21 | length 5184.9
  Top Layer w8: Q1y.21 1547.8,1001.74 1565.83,1019.77 1565.83,1182.22 1582.72,1199.11 1752.46,1199.11 1762.44,1209.09 1825.23,1209.09 1838.58,1222.44 v1(1838.58,1287.4) ; v1(2020,1315) v1(1920,1215) 2045,1090 v1(2160,1090) ; v1(2175,1845) 2175,1925 v1(2205,1955) ; v1(2735,875) 2875.95,875 2882.41,881.46 Q1x.21 ; v1(2875,1755) 2877.22,1757.22 2998.8,1757.22 Q1z.21
  Bottom Layer w8: *.J2_10 1441,2481 1821.63,2481 1840,2462.63 1840,2057.63 1895,2002.63 2212.37,2002.63 2227.5,1987.5 ; v1(1838.58,1287.4) 1847.6,1287.4 v1(1920,1215) ; v1(2020,1315) 2175,1470 2175,1521.82 2177,1523.82 2177,1546.18 2175,1548.18 v1(2175,1845) ; v1(2160,1090) 2160,1045 2500,705 2628.18,705 2735,811.82 v1(2735,875) ; v1(2205,1955) 2227.5,1977.5 2227.5,1987.5 ; v1(2875,1755) 2827,1803 2337,1803 2280,1860 2280,1935 2227.5,1987.5
Net*_J1_7: *.J1_7 M2.2 | length 135.9
  Top Layer w8: *.J1_7 2336.86,2293.14 2336.86,2258.14 2363.38,2231.62 M2.2
Net*_J1_9: *.J1_9 M1.2 | length 128.5
  Top Layer w8: *.J1_9 2232,2298 2232,2258 2245,2245 2245,2185.49 M1.2
Net*_J1_11: *.J1_11 M0.2 | length 121.1
  Top Layer w8: *.J1_11 2126.3,2303.7 2126.3,2186.3 M0.2
NetC1_2: C1.2@1325,1821.5 D1.2@1150.31,1889.24 P1.1 Q1.4 | length 1002.2
  Top Layer w8: D1.2@1150.31,1889.24 1151.06,1890 D1.2@1160.54,1899.48 ; 1320,1890 1325,1885 C1.2@1325,1821.5 ; 1360.31,1890 1365,1894.69
  Top Layer w62.99: D1.2@1151.06,1890 1320,1890 1360.31,1890 ; D1.2@1160.54,1899.48 Q1.4 ; 1365,1894.69 1365,2105 1369.09,2105 1382.05,2117.95 P1.1
NetC1_SC1_1: C1x.1 Q1x.1 | length 216.5
  Top Layer w8: C1x.1 3016.98,610.56 3111.18,610.56 3145,644.38 3145,700.42 3146.91,702.32 Q1x.1
NetC1_SC1_2: C1x.2 Q1x.2 | length 451.7
  Top Layer w8: C1x.2 2935,598.58 2935,562.17 2939.69,557.49 3082.49,557.49 3200,675 3200,715 3187.82,727.18 3148.41,727.18 Q1x.2
NetC1_SC2_1: C1y.1 Q1y.1 | length 98
  Top Layer w8: Q1y.1 1742.68,725.91 C1y.1
NetC1_SC2_2: C1y.2 Q1y.2 | length 203.3
  Top Layer w8: Q1y.2@1769.3,848.2 Q1y.2 1743.41,847.47 1782.53,847.47 1790,840 1790,751.42 C1y.2
NetC1_SC3_1: C1z.1 Q1z.1 | length 146.8
  Top Layer w8: C1z.1 3188.58,1513.58 3220,1545 Q1z.1
NetC1_SC3_2: C1z.2 Q1z.2 | length 202.4
  Top Layer w8: Q1z.2 3220.73,1603.68 3256.32,1603.68 3263.5,1596.5 3263.5,1446.42 3260,1446.42 C1z.2
NetC5_SC1_1: C5x.1 Q1x.3 R9x.2 | length 1225.5
  Top Layer w8: C5x.1 2209.57,745.98 R9x.2 2210,743.58 v1(2210,690) ; v1@3100,638.42 v1(3100,637.56) 3095.79,641.77 3095.79,658.5 3095.5,658.79 3095.5,726.92 3122.09,753.5 Q1x.3
  Bottom Layer w8: v1(2210,690) 2475,690 2500,665 2680,665 2707.44,637.56 v1(3100,637.56)
NetC5_SC2_1: C5y.1 Q1y.3 R9y.2 | length 1226.4
  Top Layer w8: C5y.1 856.57,734.02 R9y.2 856.57,617.13 913.7,560 1060,560 1165,665 1625,665 1690,730 1690,786.62 1690.5,787.13 1690.5,847.21 1717.09,873.79 Q1y.3
NetC5_SC3_1: C5z.1 Q1z.3 R9z.2 | length 675.5
  Top Layer w8: C5z.1 2791.89,1579.57 2845.56,1525.9 3150.39,1525.9 3167.83,1543.34 3167.83,1603.42 3194.41,1630 Q1z.3
NetD1_2: D1.2@555.83,1287.17 J1.1 | length 183.7
  Top Layer w98.43: J1.1@555.83,1103.47 D1.2@555.83,1287.17
NetP1_SC1_1: P1x.1 Q1x.5 | length 332.6
  Top Layer w15.75: Q1x.5 3228.98,804.69 3338.66,695 3427.78,695 P1x.1
NetP1_SC1_2: P1x.2 Q1x.7 | length 308.9
  Top Layer w15.75: Q1x.7 3284.13,855.87 3335,805 3426.2,805 P1x.2
NetP1_SC1_3: P1x.3 Q1x.8 | length 298.2
  Top Layer w15.75: Q1x.8 3286.46,881.46 3310,905 3424.63,905 P1x.3
NetP1_SC1_4: P1x.4 Q1x.10 | length 311
  Top Layer w15.75: Q1x.10 3213.98,932.64 3227.21,945.87 3305.87,945.87 3355.28,995.28 P1x.4
NetP1_SC2_1: P1y.1 Q1y.5 | length 356.5
  Top Layer w15.75: Q1y.5 1744.11,923.54 1797.8,923.54 1822.21,899.13 1860.87,899.13 1870.87,889.13 1870.87,796.61 1880.1,787.39 1960.76,787.39 P1y.1
NetP1_SC2_2: P1y.2 Q1y.7 | length 282.7
  Top Layer w15.75: Q1y.7 1801.6,976.15 1812.37,965.38 1881.2,965.38 P1y.2
NetP1_SC2_3: P1y.3 Q1y.8 | length 252.5
  Top Layer w15.75: Q1y.8 1809.6,1001.74 1822.21,989.13 1891.03,989.13 1915.16,965 P1y.3
NetP1_SC2_4: P1y.4 Q1y.10 | length 249
  Top Layer w15.75: Q1y.10 1848.41,1052.92 1857.21,1044.13 1946.02,1044.13 1965.32,1063.43 P1y.4
NetP1_SC3_1: P1z.1 Q1z.5 | length 242.4
  Top Layer w15.75: Q1z.5 3265.16,1681.18 3331.34,1615 P1z.1
NetP1_SC3_2: P1z.2 Q1z.7 | length 230.8
  Top Layer w8: P1z.2@3433.43,1715 P1z.2
  Top Layer w15.75: Q1z.7 3268.7,1732.36 3272.21,1735.87 3307.79,1735.87 3333.66,1710 3431.57,1710 P1z.2
NetP1_SC3_3: P1z.3 Q1z.8 | length 237.3
  Top Layer w15.75: Q1z.8 3221.67,1759.62 3284.62,1759.62 3336.85,1811.85 P1z.3
NetP1_SC3_4: P1z.4 Q1z.10 | length 290.1
  Top Layer w15.75: Q1z.10 3285.78,1809.13 3320.87,1844.23 3320.87,1900.87 3330.28,1910.28 P1z.4
NetP2_1: Q1x.22 sX.1 | length 1356.1
  Top Layer w8: sX.1@2115,235 sX.1 ; v1(2780,600) v1(2780,665) ; v1(2850,835) 2870.87,855.87 Q1x.22
  Bottom Layer w8: sX.1 2100,260 2064.69,260 2060,264.69 2060,375 2100,415 2110,415 2112,413 2599.47,413 2687.63,501.16 2687.63,507.63 v1(2780,600) ; v1(2780,665) 2780,765 v1(2850,835)
NetP3_2: dX.2 Q1x.20 | length 2963.6
  Top Layer w8: v1(2000,2175) 1942.63,2232.37 1931.16,2232.37 1878,2285.53 1878,2573.31 1919.69,2615 2181.61,2615 2235.8,2669.2 dX.2 ; v1(2070,1855) v1(2070,2030) ; v1(2095,1685) 2164,1616 2311.63,1616 2545,1382.63 2545,980 v1(2600,925) ; v1(2835,905) 2837.05,907.05 Q1x.20
  Bottom Layer w8: v1(2000,2175) 2070,2105 v1(2070,2030) ; v1(2070,1855) 2095,1830 v1(2095,1685) ; v1(2600,925) 2620,905 v1(2835,905)
NetP4_1: Q1y.22 sY.1 | length 1519.8
  Top Layer w8: Q1y.22 1547.8,976.15 1570,953.95 v1(1570,740) ; v1(1820,785) 1823.21,785 1840.7,767.51 1872.49,767.51 2010,630 2010,205 2050,165 2205,165 2235,195 2235,237.92 sY.1
  Bottom Layer w8: v1(1570,740) 1657.5,740 1702.5,785 v1(1820,785)
NetP6_2: dY.2 Q1y.20 | length 2636.4
  Top Layer w8: v1(1230,1035) 1237.67,1027.33 Q1y.20 ; v1(1365,1585) 1370,1585 1725,1940 1740,1940 v1(1885,2085) ; v1(1890,2200) 1890,2210 1835,2265 1835,2575 1929.2,2669.2 dY.2
  Bottom Layer w8: v1(1230,1035) 1138,1127 1138,1508 1215,1585 v1(1365,1585) ; v1(1885,2085) 1887.5,2087.5 1887.5,2197.5 v1(1890,2200)
NetP9_1: Q1z.22 sZ.1 | length 3998.8
  Top Layer w8: v1(2930,1720) 2935.95,1720 2948.32,1732.36 Q1z.22
  Bottom Layer w8: sZ.1 2421.57,175 2530.31,175 2535,179.69 2535,330 2580,375 3165,375 3315,525 3315,631.82 3380,696.82 v1(3380,2045) 3300,2045 3255,2000 3255,1800 3315,1740 3315,1605 3246.31,1536.31 2935,1536.31 2935,1710 2930,1715 v1(2930,1720)
NetP10_1: R1.1 S.1 | length 114.4
  Top Layer w8: S.1@2475,239.46 S.1 2582.22,240.8 R1.1
NetP10_2: dZ.2 Q1z.20 | length 1952.8
  Top Layer w8: v1(2670,1830) 2772.65,1830 2819.1,1783.54 Q1z.20
  Bottom Layer w8: dZ.2 1955,2480 2616.47,2480 2672,2424.47 2672,1832 v1(2670,1830)
NetQ1_1: Q1.1 R1.2 R2.2 | length 3796.9
  Top Layer w8: v1(777.56,2062.01) 777.56,2175 871.92,2175 Q1.1 ; v1(2575,440) 2575,326.42 R1.2 2689.02,316.42 R2.2 ; R2.2@2689.02,306.42 R2.2@2690,307.4
  Bottom Layer w8: v1(777.56,2062.01) 777.56,1184.06 875,1086.61 875,465 900,440 v1(2575,440)
NetQ1_SC1_6: Q1x.6 R3x.2 | length 965.3
  Top Layer w8: R3x.2 v1(2855,1245) ; Q1x.6 3231.49,830.28 3243,818.77 3266.23,818.77 v1(3270,815)
  Bottom Layer w8: v1(2855,1245) 2855,1150 2878,1127 3148,1127 3270,1005 v1(3270,815)
NetQ1_SC1_9: Q1x.9 R2x.2 | length 704.6
  Top Layer w8: R2x.2 2840.66,1129.34 v1(2870,1100) ; Q1x.9 3216.49,907.05 3228.03,918.59 3236.41,918.59 v1(3240,915)
  Bottom Layer w8: v1(2870,1100) 2875,1100 2890,1085 3165,1085 3240,1010 v1(3240,915)
NetQ1_SC1_12: Q1x.12 Q1x.13 R7x.1 R8x.2 | length 466.2
  Top Layer w8: R7x.1 3061.42,1251.42 3070,1260 3122.4,1260 R8x.2 3127.95,1257.4 3167.51,1217.84 3167.51,1127.01 3098.82,1058.31 3098.82,1032.68 3122.09,1009.41 Q1x.13 Q1x.12
NetQ1_SC2_6: Q1y.6 R3y.2 | length 892
  Top Layer w8: R3y.2 1400.66,1250 v1(1455,1250) ; Q1y.6 1799.09,950.56 1804.14,945.5 1813.54,945.5 1829.05,930 v1(1835,930)
  Bottom Layer w8: v1(1455,1250) 1503.4,1298.4 1767.34,1298.4 1802.59,1263.15 1802.59,962.41 v1(1835,930)
NetQ1_SC2_9: Q1y.9 R2y.2 | length 922.5
  Top Layer w8: R2y.2 1400.48,1362.9 1836.9,1362.9 1881.58,1318.22 1881.58,1156.58 v1(1835,1110) ; Q1y.9 1821.71,1027.33 1829.05,1020 v1(1835,1020)
  Bottom Layer w8: v1(1835,1020) v1(1835,1110)
NetQ1_SC2_12: Q1y.12 Q1y.13 R7y.1 R8y.2 | length 553.2
  Top Layer w8: R7y.1@1615.72,1304.64 1699.55,1304.64 R8y.2 1721.59,1320 1844.17,1320 1865.58,1298.59 1865.58,1184.48 1810.8,1129.7 Q1y.13 Q1y.12
NetQ1_SC3_6: Q1z.6 R3z.2 | length 897.7
  Top Layer w8: v1(2775,2000) R3z.2 ; Q1z.6 3221.77,1705 v1(3285,1705)
  Bottom Layer w8: v1(2775,2000) 3114.81,2000 3170,1944.81 3170,1714.69 3179.69,1705 v1(3285,1705)
NetQ1_SC3_9: Q1z.9 R2z.2 | length 567.5
  Top Layer w8: R2z.2 2890,2064.14 2890,2000 v1(2920,1970) ; v1(3070,1970) 3144.81,1970 3176.5,1938.3 3176.5,1801.45 3194.41,1783.54 Q1z.9
  Bottom Layer w8: v1(2920,1970) v1(3070,1970)
NetQ1_SC3_12: Q1z.12 Q1z.13 R7z.1 R8z.2 | length 701.2
  Top Layer w8: R8z.2 3013.56,2289.04 3050.96,2289.04 3085,2255 3085,2147.14 R7z.1 3087.14,2145 3225,2145 3263.5,2106.5 3263.5,1903.81 3245.59,1885.91 Q1z.13 Q1z.12
nRESET: *.J24_9 Q1x.16 Q1y.16 Q1z.16 | length 4502.5
  Top Layer w8: v1(1455,1155) 1479.58,1130.42 1521.48,1130.42 Q1y.16 ; v1(2855,1045) 2866.29,1045 2894.2,1017.1 2919.52,1017.1 Q1x.16 ; v1(2863.19,1631.89) 2953.18,1541.9 3013.52,1541.9 3043.02,1571.4 3043.02,1868 3025.12,1885.91 Q1z.16
  Bottom Layer w8: v1(1455,1155) 1455,1207.98 1428,1234.98 1428,1261.18 1481.22,1314.4 1870.6,1314.4 1995,1190 ; *.J24_9 2475,655 2170,655 2130,695 2130,1150 2090,1190 1995,1190 ; v1(2855,1045) 2555,1345 2555,1410 2373.31,1591.69 2373.31,1596.69 2369.09,1600.91 ; v1(2863.19,1631.89) 2800.08,1695 2614,1695 2570,1739 2554.11,1739 2546.11,1747 2467,1747 2390,1670 2390,1621.82 2369.09,1600.91 ; 1995,1190 1995,1245 2070,1320 2088.18,1320 2369.09,1600.91
nSLEEP: *.J2_6 Q1x.17 Q1y.17 Q1z.17 | length 6176.6
  Top Layer w8: v1(1395,2225) 1760,2225 1830,2155 1965,2155 v1(2040,2080) ; v1(1445,1110) 1450.95,1110 1456.85,1104.11 Q1y.17 ; *.J2_6 v1(1565,2510) ; v1(1760,1840) 1785,1865 2000.31,1865 2005,1869.69 2005,2000 2040,2035 v1(2040,2080) ; v1(2050,1390) 2115,1325 v1(2150,1325) ; v1(2850,1000) 2855.82,1000 2872,983.82 Q1x.17 ; Q1z.17 2933.39,1860.32 2925.7,1868 2732,1868 2465,2135 2095,2135 v1(2040,2080)
  Bottom Layer w8: v1(1395,2225) 1395,1290 1400,1285 1400,1155 v1(1445,1110) ; v1(1565,2510) 1815.25,2510 1856,2469.25 1856,2075.82 1873.82,2058 2018,2058 v1(2040,2080) ; v1(1760,1840) 1760,1585 1955,1390 v1(2050,1390) ; v1(2150,1325) 2265.48,1325 2275.04,1315.44 2534.56,1315.44 v1(2850,1000)
SPINDLE: *.J24_8 S.2 | length 201.1
  Top Layer w8: *.J24_8@2436.86,493.14 *.J24_8 2425,450 2473.65,401.35 S.2
STEPx: *.J24_2 sX.2 | length 167.1
  Top Layer w8: sX.2 2122.5,342.5 2122.5,502.5 *.J24_2
STEPy: *.J24_4 sY.2 | length 178.6
  Top Layer w8: *.J24_4@2231.44,498.56 *.J24_4 2225,435 2235,425 2235,343.69 sY.2
STEPz: *.J24_6 sZ.2 | length 176.9
  Top Layer w8: *.J24_6 2325,450 2350,425 2350,346.57 sZ.2
pads on no net: *.J1_1 *.J1_2 *.J1_3 *.J1_4 *.J1_5 *.J1_8 *.J1_10 *.J1_13 *.J1_14 *.J1_15 *.J2_1 *.J2_3 *.J2_4 *.J2_5 *.J2_7 *.J2_9 *.J2_11 *.J2_12 *.J2_13 *.J2_14 *.J2_15 *.J2_16 *.J2_17 *.J2_18 *.J2_19 *.J2_20 *.J24_1 *.J24_3 *.J24_5 *.J24_7 *.J24_10 *.J24_11 *.J24_12 *.J25_1 *.J25_2 *.J25_3 *.J25_4 *.J25_5 *.J25_6 *.J25_7 *.J25_8 *.J25_9 *.J25_10 *.J25_11 *.J25_13 *.J25_15 Q1x.23 Q1x.27 Q1y.23 Q1y.27 Q1z.23 Q1z.27

## Polygon pours and split planes (outlines as drawn)
GND on Bottom Layer "Bottom Layer-No Net" (solid, pour order 12): 3444.73,0 ccw(c3444.73,197) 3641.73,197 3641.73,2657.33 ccw(c3444.73,2657.33) 3444.73,2854.33 197,2854.33 ccw(c197,2657.33) 0,2657.33 0,197 ccw(c197,197) 197,0
GND on Top Layer "Top Layer-No Net" (solid, pour order 11): 3444.88,0 ccw(c3444.88,196.85) 3641.73,196.85 3641.73,2657.33 ccw(c3444.73,2657.33) 3444.73,2854.33 197,2854.33 ccw(c197,2657.33) 0,2657.33 0,197 ccw(c197,197) 197,0

## Keep-outs
Top Layer:
  lines w10: 158.48,0 3445.91,0 ccw(c3445.91,195.82) 3641.73,195.82 3641.73,2658.36 ccw(c3445.76,2658.36) 3445.76,2854.33 195.97,2854.33 ccw(c195.97,2658.36) 0,2658.36 0,195.91 ccw(c195.91,195.91) 195.91,0

## Silkscreen, mask and mechanical layers (free items; w line width, h text height)
Top Overlay:
  text "CC2511 JCU Cairns" at 551.18,2716.54 h60
  text "Group 9" at 123.03,384.84 h60
  text "William Belcher / Mischa Burgess / Jai Wilson" at 118.11,78.74 h60
Bottom Overlay:
  drawing of 276 lines, arcs and shapes, not listed

## Text inside footprints (layer, text, board x,y; h text height)
C8: Top Overlay "+" at 876.95,1507.52 h60 r90
C9: Top Overlay "+" at 2320.95,1059.72 h60 r90
C10: Top Overlay "+" at 999.44,997.52 h60 r90
C11: Top Overlay "+" at 1956.7,1917.48 h60 r270